# Altium PCB stm32f103.PcbDoc
Units mm, origin at the board's own origin, x right, y up, seen from the top; angles counter-clockwise.
Board outline 59.05 x 67.94 mm, 2 copper layers (Top Layer, Bottom Layer); 29 components, 48 nets, 158 pads, 41 vias.
Unrouted connection lines stored in the file: 1.
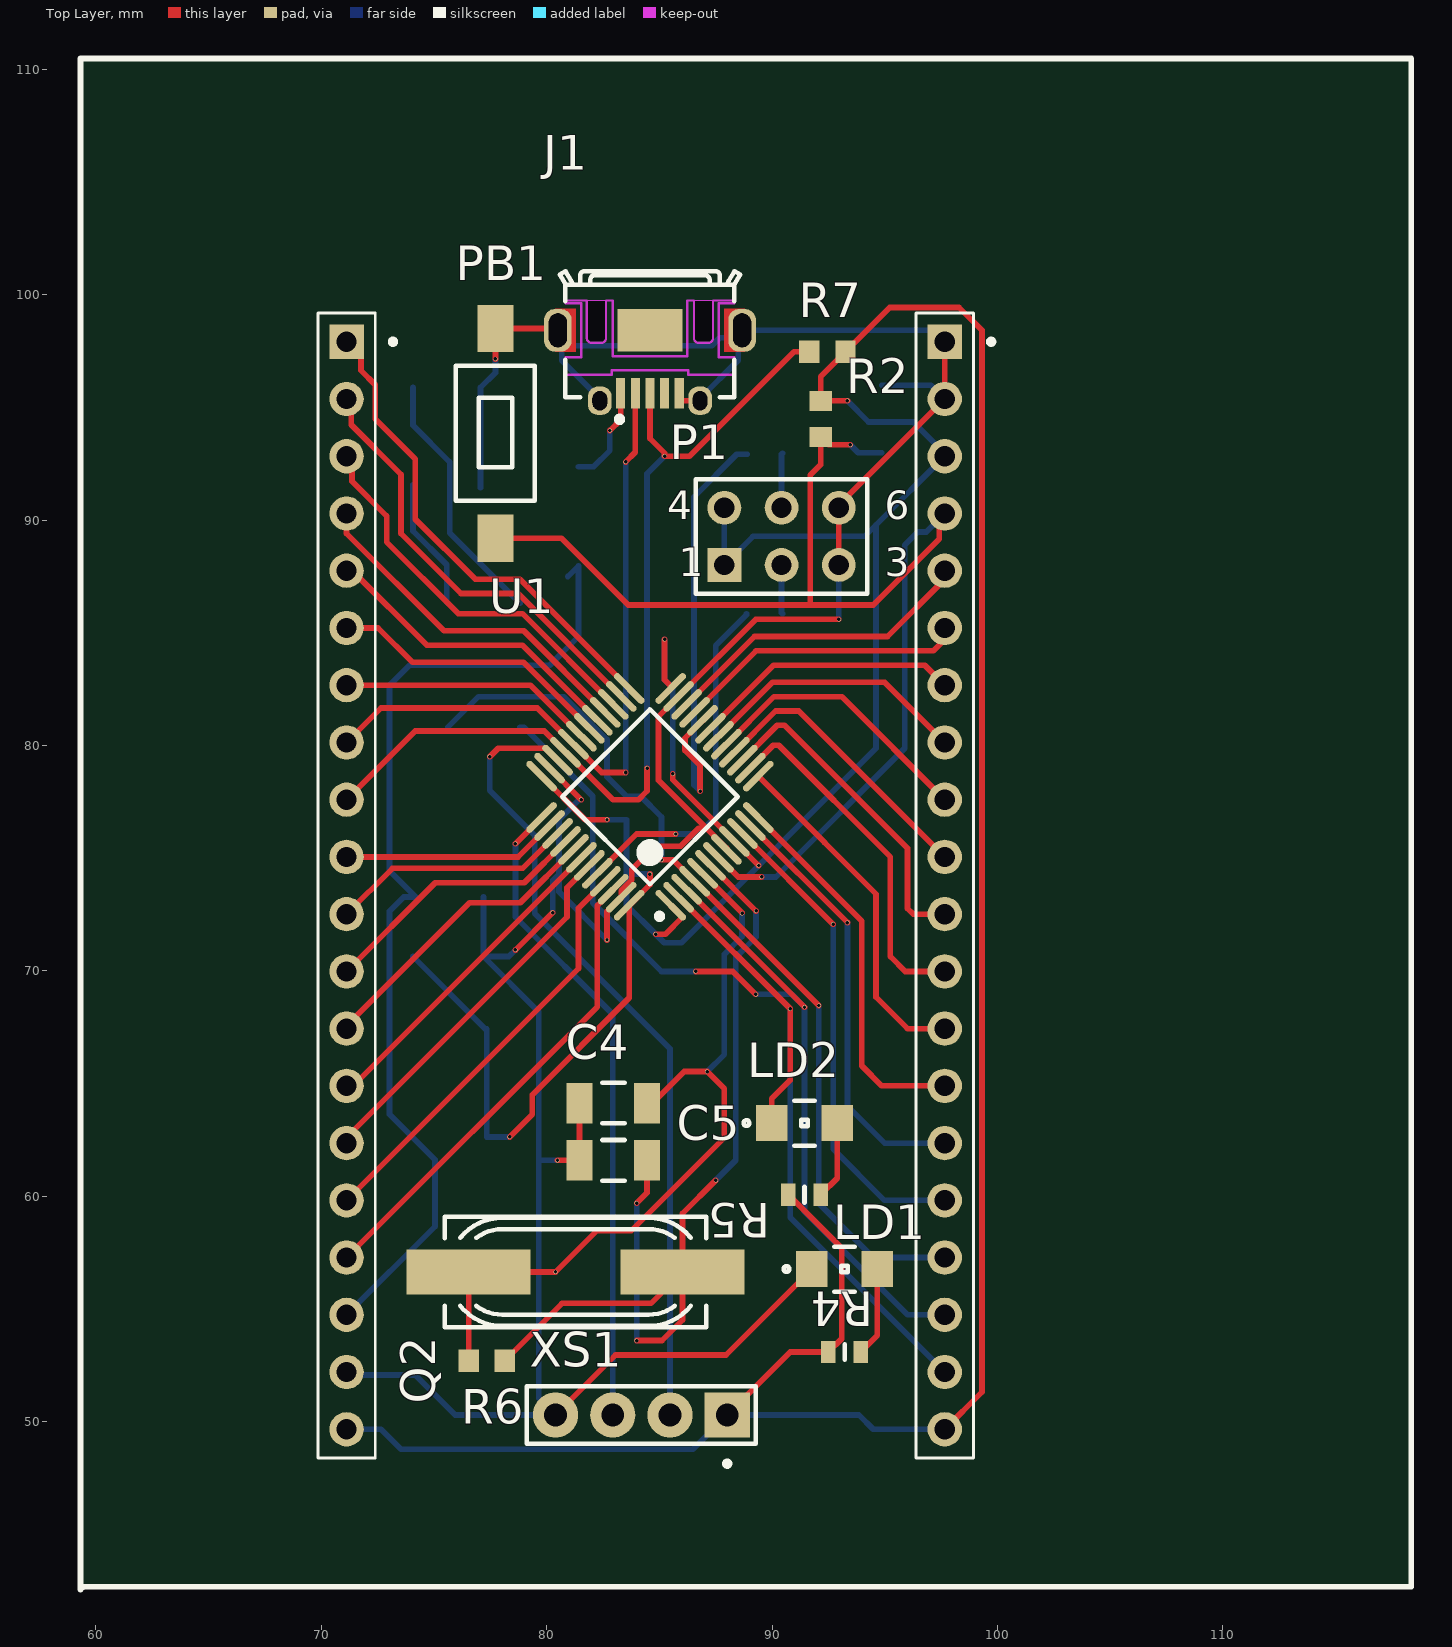
[diagram p0: Top Layer view]
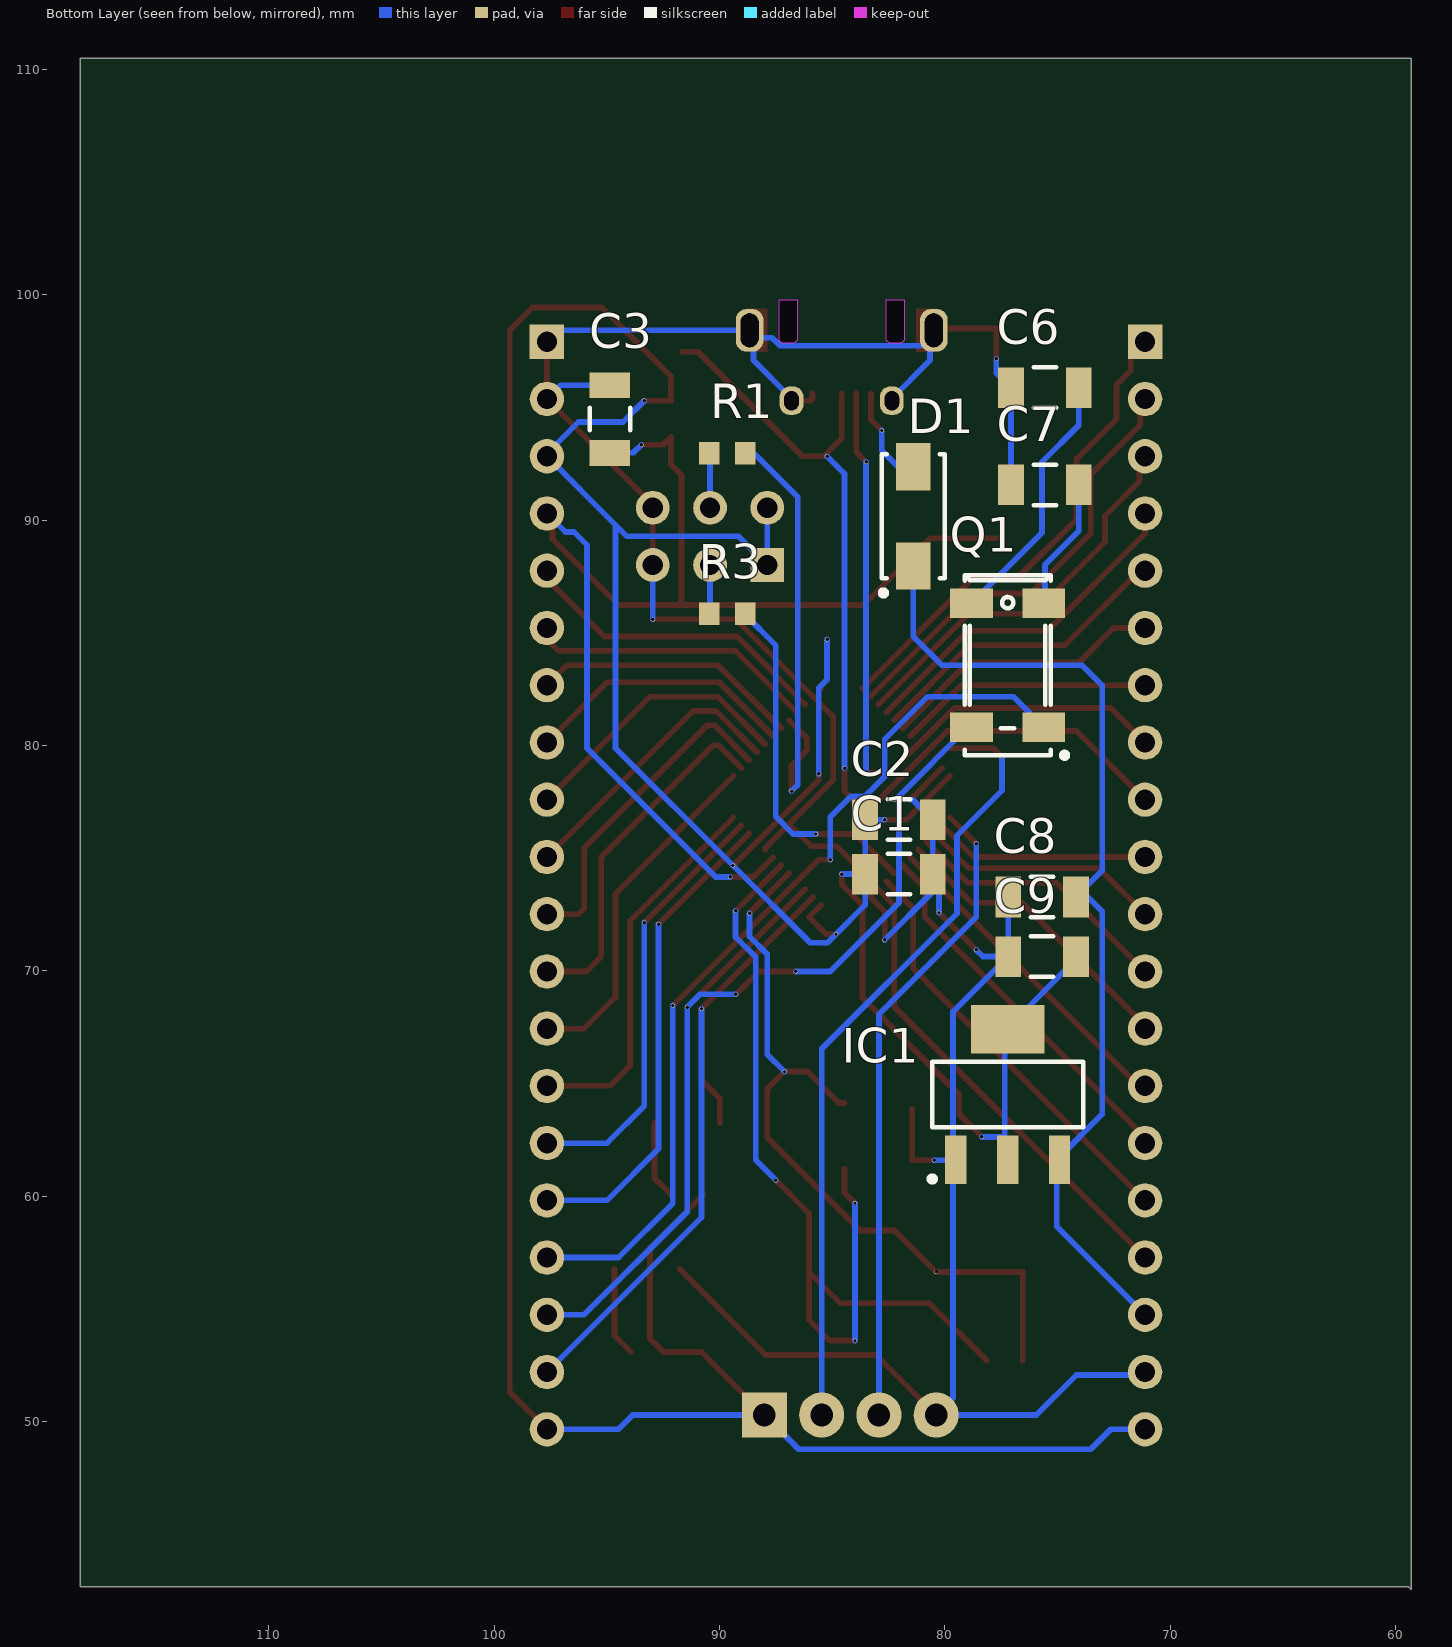
[diagram p1: Bottom Layer view, seen from below]
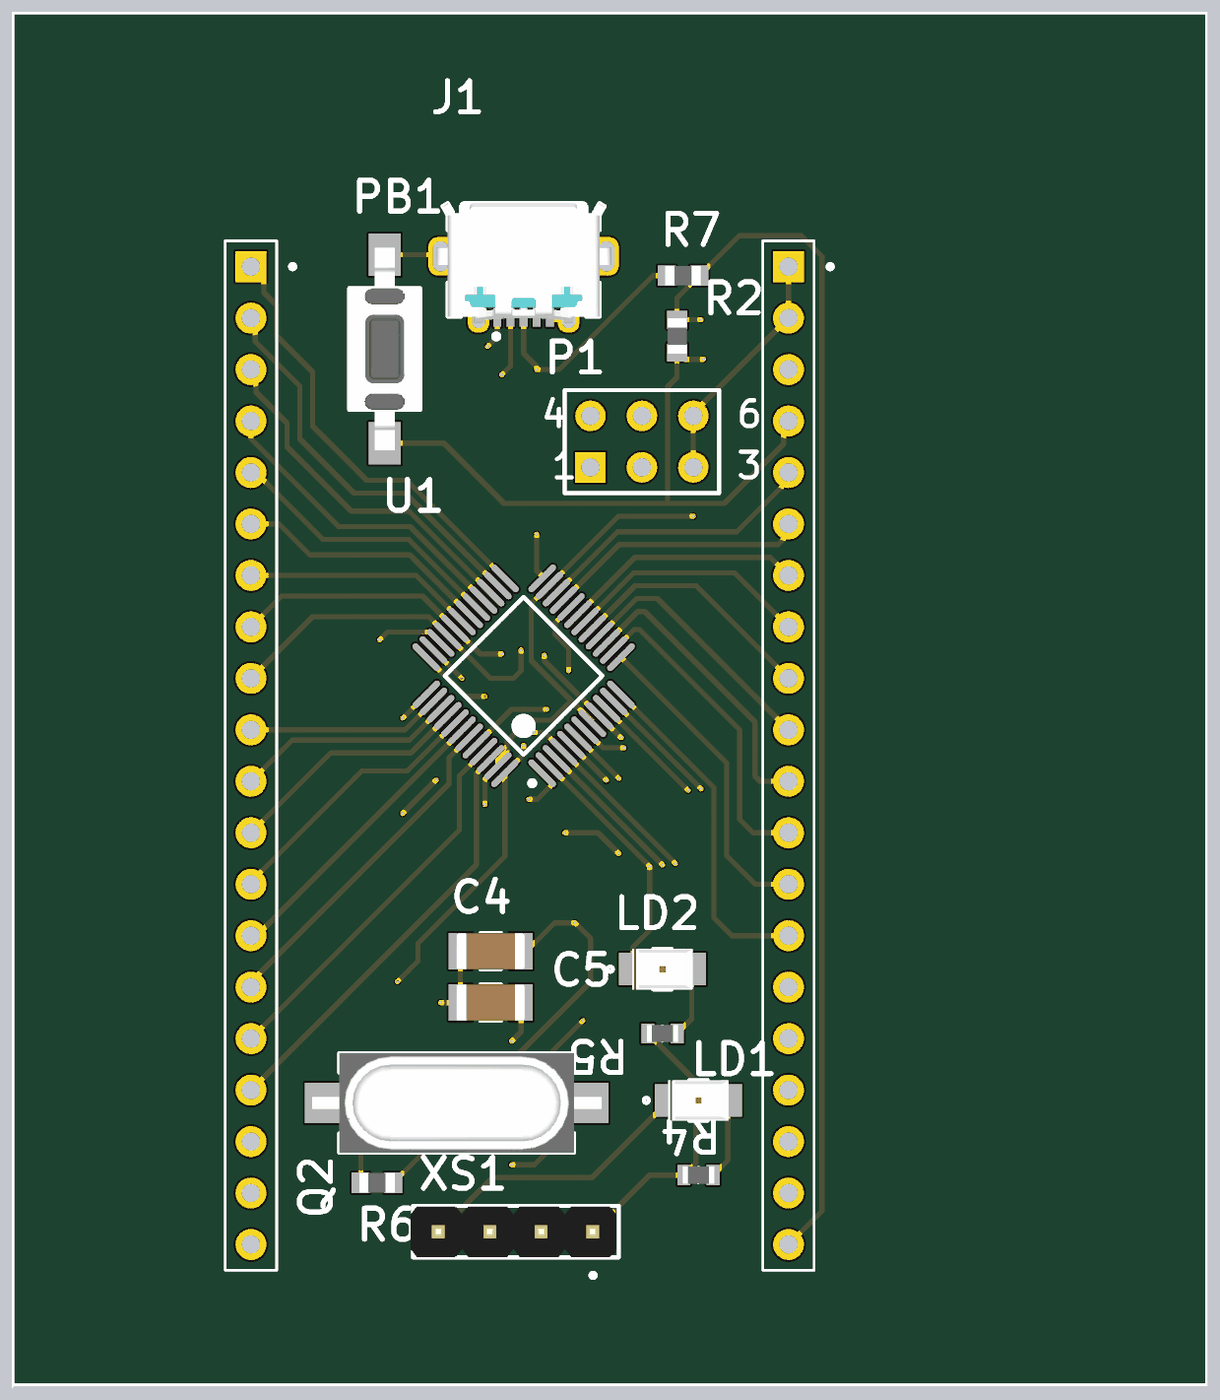
[diagram p2: 3D render of the assembled board from above, using the file's embedded part models]
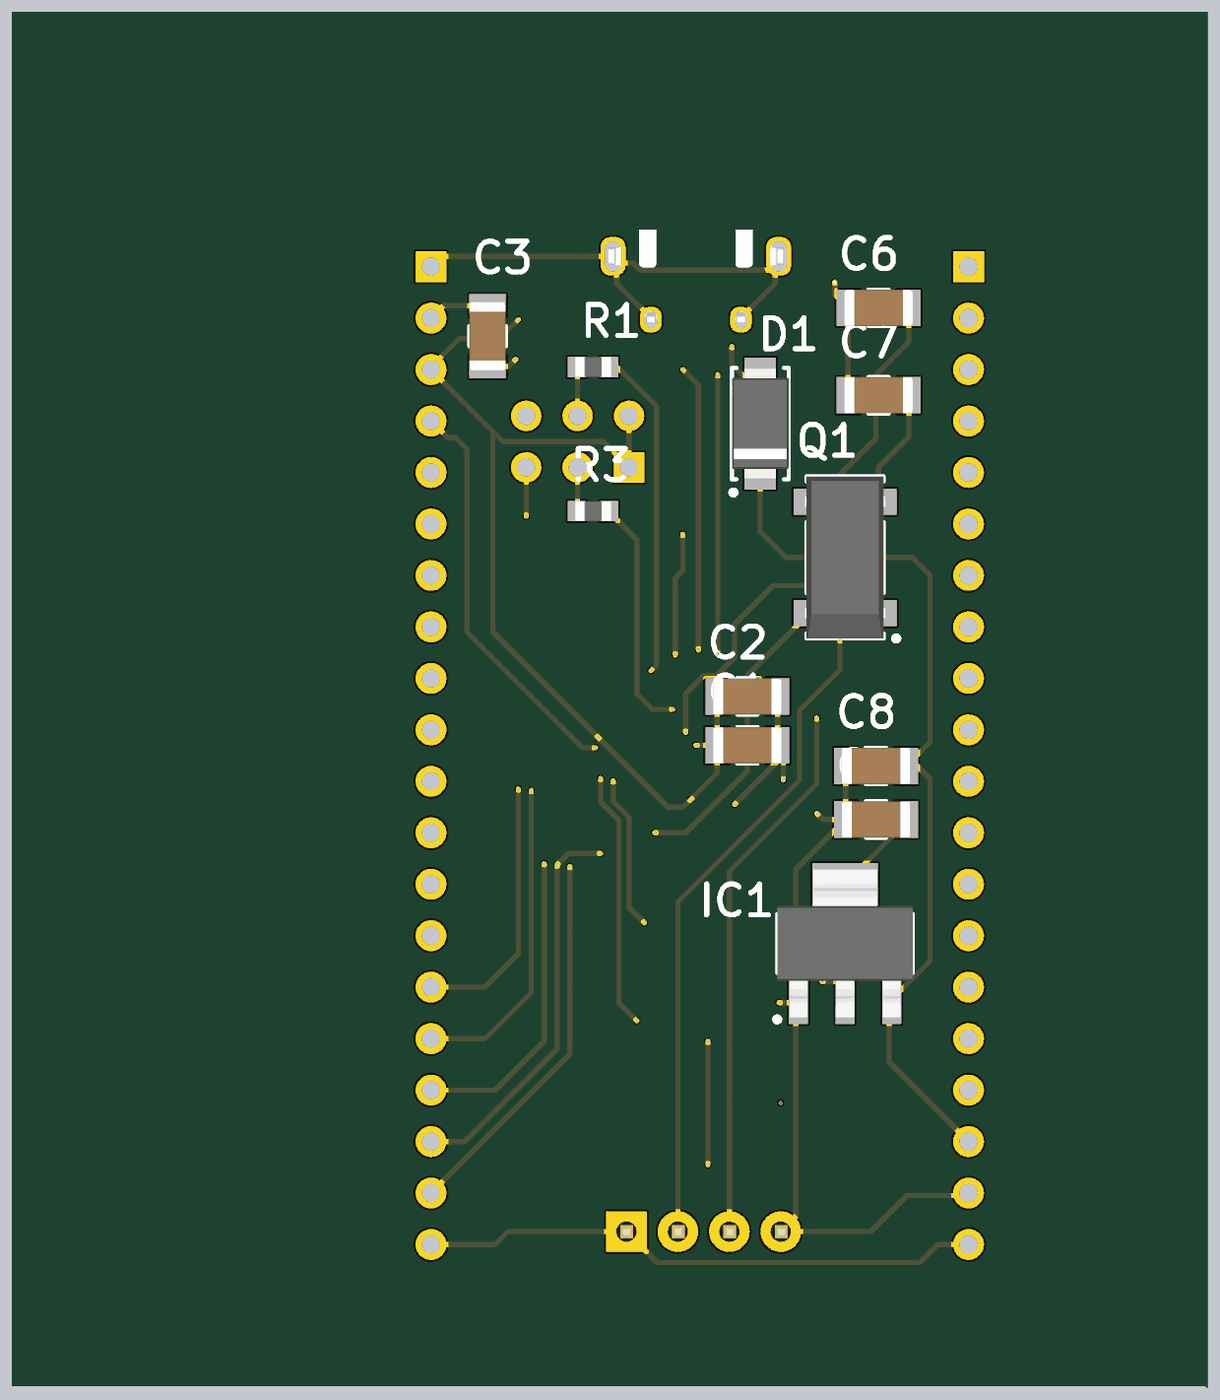
[diagram p3: 3D render of the assembled board from below, using the file's embedded part models]

## Layer stack, top to bottom
Top Solder: solder mask 0.0102, Solder Resist, Dk 3.5
Top Layer: signal copper 0.0356
Dielectric 1: dielectric 0.32, FR-4, Dk 4.8
Bottom Layer: signal copper 0.0356
Bottom Solder: solder mask 0.0102, Solder Resist, Dk 3.5

## Board outline
59.309,42.545 59.436,42.672 118.364,42.672 118.364,110.49 59.309,110.49

## Design rules (kind name [scope] priority, off if disabled: settings)
Clearance [All] p1: gap=0.01
HoleToHoleClearance [All] p1: gap=0 allowstackedmicrovias=TRUE
MinimumSolderMaskSliver [All] p1: minsoldermaskwidth=0
PolygonConnect [All] p1: connectstyle=Relief reliefconductorwidth=0.254 reliefentries=4 polygonreliefangle="90 Angle" airgapwidth=0.254
RoutingVias [All] p1: holewidth=0.711 width=1.27 viastyle="Through Hole" minholewidth=0.711 minwidth=1.27 maxholewidth=0.711 maxwidth=1.27
SilkToSilkClearance [All] p1: silktosilkclearance=0
SilkToSolderMaskClearance [IsPad] p1: minsilkscreentomaskgap=0 clearancetoexposedcopper=TRUE
SolderMaskExpansion [All] p1: expansion=0.102
UnRoutedNet [All] p1 off:
Width [All] p1: maxlimit=0.254 minlimit=0.254 preferedwidth=0.254
25 further rules are at their usual default settings.

## Components (designator, comment, footprint, x,y, rotation, side; value= is the part's Value field where it differs from the comment)
C1 "100nF" CAPC3216X140N 82.042,74.295 r180 bottom
C2 "1uF" CAPC3216X140N 82.042,76.708 r180 bottom
C3 "100nF" CAPC3216X140N 94.869,94.488 r270 bottom
C4 "22pF" CAPC3216X140N 82.956,64.135 r0 top
C5 "22pF" CAPC3216X140N 82.956,61.595 r0 top
C6 "22pF" CAPC3216X140N 75.565,95.885 r0 bottom
C7 "22pF" CAPC3216X140N 75.565,91.567 r0 bottom
C8 "100nF" CAPC3216X140N 75.692,73.279 r180 bottom
C9 "100nF" CAPC3216X140N 75.692,70.634 r180 bottom
D1 "BZG03C13" DIOM5326X230N 81.407,90.17 r90 bottom
IC1 "1117" SOT230P700X180-4N 77.216,64.516 r90 bottom
J1 "Micro-USB AB 2.0" HIROSE_ZX62RD-AB-5P8(30) 84.582,95.625 r180 top
LD1 "Red" LED_DIALIGHT_597-3111-507F 93.218,56.769 r0 top
LD2 "Red" LED_DIALIGHT_597-3111-507F 91.44,63.246 r0 top
P1 "Header 3X2A" HDR2X3_CEN 87.884,88.011 r0 top
PB1 "Push Button" PB_TYCO_FSMSM 77.724,93.853 r90 top
Q1 "32.768kHz" XTAL_ABRACON_ABS25 77.216,83.566 r0 bottom
Q2 "8Mhz" XTAL1160X490X430 81.28,56.642 r180 top
R1 "10k" RESC1608X55N 89.662,92.964 r0 bottom
R2 "10k" RESC1608X55N 92.16,94.488 r90 top
R3 "10k" RESC1608X55N 89.662,85.852 r0 bottom
R4 "500R" RESC1509X55N 93.218,53.086 r180 top
R5 "500R" RESC1509X55N 91.44,60.071 r180 top
R6 "1M" RESC1608X55N 77.343,52.705 r180 top
R7 "1k5" RESC1608X55N 92.456,97.475 r180 top
U1 "STM32F103C8T6" STM-LQFP48_N 84.582,77.724 r135 top
XS1 "Ğàçú¸ì PLS-4" "HDR1X4 - WA" 88.011,50.292 r180 top
XS2 "Ğàçú¸ì PLS-20" 20SIN 71.12,97.917 r0 top
XS3 "Ğàçú¸ì PLS-20" 20SIN 97.663,97.917 r0 top

## Footprints (in the part's own frame and the unit in brackets; to place one, negate y for a bottom-side part, rotate by r counter-clockwise, add the part's x,y. Pads: shape width x height; smd on the part's side, far side on the other; paste and mask are expansions set on the pad)
20SIN [mil]
  rect 60x60 hole 35.43: 1(0,0)
  round 60 hole 35.43: 2(0,-100) 3(0,-200) 4(0,-300) 5(0,-400) 6(0,-500) 7(0,-600) 8(0,-700) 9(0,-800) 10(0,-900) 11(0,-1000) 12(0,-1100) 13(0,-1200) 14(0,-1300) 15(0,-1400) 16(0,-1500) 17(0,-1600) 18(0,-1700) 19(0,-1800) 20(0,-1900)
  silkscreen extent -50,-1950 85,50
CAPC3216X140N [mm] "Chip Capacitor, Body 3.2x1.6mm, IPC Medium Density"
  rect 1.15x1.8 smd: 1(-1.5,0) 2(1.5,0)
  silkscreen extent -0.5,-0.9 0.5,0.9, body extent -1.7,-0.9 1.7,0.9, height 1.4
DIOM5326X230N [mm] "DO-214-AC/SMA Molded Diode, Body 5.3x2.6mm, IPC Medium Density"
  rect 2.1x1.55 smd: 1(-2.2,0) 2(2.2,0)
  silkscreen extent -3.52,-1.4 2.75,1.45, body extent -2.75,-1.4 2.75,1.4, height 2.3
"HDR1X4 - WA" [mm] "Ğàçúåì äâóõğÿäíûé, øàã 2,54 ìì."
  rect 2x2 hole 1: 1(0,0)
  round 2 hole 1: 2(2.54,0) 3(5.08,0) 4(7.62,0)
  silkscreen extent -1.27,-1.27 8.89,2.26, body extent -1.15,-1.24 9.01,1.26, height 8.61
HDR2X3_CEN [mm] "Connector; Header; 3x2 Position"
  rect 1.5x1.5 hole 0.9: 1(0,0)
  round 1.5 hole 0.9: 2(2.54,0) 3(5.08,0) 4(0,2.54) 5(2.54,2.54) 6(5.08,2.54)
  silkscreen extent -1.27,-1.27 6.35,3.81
HIROSE_ZX62RD-AB-5P8(30) [mm] "Right Angle, SMD Micro-USB Type AB - Reverse (Top mount), Shell Through Hole"
  rect 0.4x1.35 smd: 1(1.3,0) 2(0.65,0) 3(0,0) 4(-0.65,0) 5(-1.3,0)
  rrect80% 1.225x1.9 hole 0.8 slot 1.5 at 90 deg: 6(-4.088,-2.8) 6(4.088,-2.8)
  rrect80% 1.05x1.25 hole 0.65 slot 0.85 at 90 deg: 6(-2.225,0.325) 6(2.225,0.325)
  rect 2.9x1.9 smd: PastePad(0,-2.8)
  Top Layer region: -4.2,-1.85 -4.2,-3.75 -3.3,-3.75 -3.3,-3.75 -3.3,-1.85
  Top Layer region: 4.2,-3.75 4.2,-1.85 3.3,-1.85 3.3,-1.85 3.3,-3.75
  Top Layer keep-out lines w0.1: 3.75,-0.825 1.7,-0.825 1.7,-1.025 -1.7,-1.025 -1.7,-0.825 -3.75,-0.825 -3.75,-1.6 -3.05,-1.6 -3.05,-4 -3.75,-4 -3.75,-4.125 -2.8,-4.125 -2.8,-2.45 cw(c-2.6,-2.45) -2.6,-2.25 -2.15,-2.25 cw(c-2.15,-2.45) -1.95,-2.45 -1.95,-4.125 -1.65,-4.125 -1.65,-1.65 1.65,-1.65 1.65,-4.125 1.95,-4.125 1.95,-2.45 cw(c2.15,-2.45) 2.15,-2.25 2.6,-2.25 cw(c2.6,-2.45) 2.8,-2.45 2.8,-4.125 3.75,-4.125 3.75,-4 3.05,-4 3.05,-1.6 3.75,-1.6 3.75,-0.825
  Keep-Out Layer board cut-out: 1.95,-4.125 1.95,-2.45 1.965,-2.373 2.009,-2.309 2.074,-2.265 2.15,-2.25 2.15,-2.25 2.6,-2.25 2.677,-2.265 2.741,-2.309 2.785,-2.373 2.8,-2.45 2.8,-2.45 2.8,-4.125
  Keep-Out Layer board cut-out: -2.8,-4.125 -2.8,-2.45 -2.785,-2.373 -2.741,-2.309 -2.676,-2.265 -2.6,-2.25 -2.6,-2.25 -2.15,-2.25 -2.073,-2.265 -2.009,-2.309 -1.965,-2.373 -1.95,-2.45 -1.95,-2.45 -1.95,-4.125
  silkscreen extent -4,-5.42 4,1.27, body extent -4.32,-5.42 4.33,0.47, height 2.78
LED_DIALIGHT_597-3111-507F [mm] "SMT AlGaAs Red LED, Body 3x1.6mm (1208),  DIALIGHT 597 Serie"
  rect 1.4x1.6 smd: 1(-1.45,0) 2(1.45,0)
  silkscreen extent -2.7,-1 0.45,1, body extent -1.5,-1 1.5,1, height 1.5
PB_TYCO_FSMSM [mm] "Body 3.5x6.0mm, Pushbutton Switch,  TYCO FSMSM Serie"
  rect 2.1x1.6 smd: 1(-4.65,0) 2(4.65,0)
  silkscreen extent -3,-1.75 3,1.75, body extent -5,-1.75 5,1.75, height 4.3
RESC1509X55N [mm] "Chip Resistor, EIA 0603, Metric 1608, 1.55mm L X 0.85mm W X 0.55mm H, IPC Medium Density"
  rect 0.65x0.99 smd: 1(-0.72,0) 2(0.72,0)
  silkscreen extent 0,-0.35 0,0.35, body extent -0.77,-0.42 0.78,0.43, height 0.55
RESC1608X55N [mm] "Chip Resistor, EIA 0603, Metric 1608, Body 1.6x0.8mm, IPC Medium Density"
  rect 0.9x1 smd: 1(-0.8,0) 2(0.8,0)
  body extent -0.87,-0.47 0.88,0.48, height 0.55
SOT230P700X180-4N [mm] "SOT223, 2.30mm pitch; 3 pin, 3.70mm W X 6.70mm L, IPC Medium Density"
  rect 2.15x0.95 smd: 1(-2.9,2.3) 2(-2.9,0) 3(-2.9,-2.3)
  rect 2.15x3.25 smd: 4(2.9,0)
  silkscreen extent -3.87,-3.35 1.45,3.48, body extent -3.65,-3.35 3.65,3.35, height 1.81
STM-LQFP48_N [mm] "QFP, 48-Leads, Body 7x7mm, Pitch 0.5mm, IPC Medium Density"
  oval 1.8x0.3 smd: 1(-4.05,2.75) 2(-4.05,2.25) 3(-4.05,1.75) 4(-4.05,1.25) 5(-4.05,0.75) 6(-4.05,0.25) 7(-4.05,-0.25) 8(-4.05,-0.75) 9(-4.05,-1.25) 10(-4.05,-1.75) 11(-4.05,-2.25) 12(-4.05,-2.75) 25(4.05,-2.75) 26(4.05,-2.25) 27(4.05,-1.75) 28(4.05,-1.25) 29(4.05,-0.75) 30(4.05,-0.25) 31(4.05,0.25) 32(4.05,0.75) 33(4.05,1.25) 34(4.05,1.75) 35(4.05,2.25) 36(4.05,2.75)
  oval 0.3x1.8 smd: 13(-2.75,-4.05) 14(-2.25,-4.05) 15(-1.75,-4.05) 16(-1.25,-4.05) 17(-0.75,-4.05) 18(-0.25,-4.05) 19(0.25,-4.05) 20(0.75,-4.05) 21(1.25,-4.05) 22(1.75,-4.05) 23(2.25,-4.05) 24(2.75,-4.05) 37(2.75,4.05) 38(2.25,4.05) 39(1.75,4.05) 40(1.25,4.05) 41(0.75,4.05) 42(0.25,4.05) 43(-0.25,4.05) 44(-0.75,4.05) 45(-1.25,4.05) 46(-1.75,4.05) 47(-2.25,4.05) 48(-2.75,4.05)
  silkscreen extent -4.17,-2.75 2.75,3.57, body extent -3.5,-3.5 3.5,3.5, height 1.6
XTAL1160X490X430 [mm] "HC49/4H SMX Case, SMD Cristal, Body 11.6x4.9mm"
  rect 5.5x2 smd: 1(-4.75,0) 2(4.75,0)
  silkscreen extent -5.8,-2.45 5.8,2.45, body extent -7.15,-2.45 7.15,2.45, height 4.3
XTAL_ABRACON_ABS25 [mm] "4 Pins, 8mm L X 3.8mm W X 2.7mm H, SMD Crystal, ABS25 Serie"
  rect 1.9x1.3 smd: 1(-1.6,2.75) 2(-1.6,-2.75) 3(1.6,-2.75) 4(1.6,2.75)
  silkscreen extent -2.65,-4 1.9,4.12, body extent -2,-4 2,4, height 2.7

## Part data
C1 C3 C8 C9: library part CC1206_100NF_50V_10%_X7R, "Non-polarised capacitor"
C2: library part CC1206_1UF_50V_10%_X7R, "Non-polarised capacitor"
C4 C5: library part CC1206_12PF_50V_5%_NP0, "Non-polarised capacitor"
C6 C7: library part CC1206_100PF_50V_5%_NP0, "Non-polarised capacitor"
D1: "Zener Diode"
IC1: library part ADP3339AKCZ-1.8, "3-Terminal Regulator 1=GND 2=OUT 3=IN 4=OUT"
J1: library part HIROSE_ZX62RD-AB-5P8(30), "5 Pin + 1 Shield USB Receptacle"
LD1 LD2: library part LED_DIALIGHT_597-3111-507F, "LED Red 1C 2A"
P1: "Header, 3-Pin, Dual row"
PB1: library part PB_TYCO_FSMSM, "Push-Button Switch SPDT"
Q1: library part XTAL_32.768KHZ_ABRACON_ABS25-32.768KHZ-T, "Crystal 4 pins 1=XTAL Control 2 And 3=NC 4=XTAL"
Q2: library part XTAL_10MHZ_IQD_LFXTAL003166, "Quartz Crystal"
R1 R3: library part R0603_10K_0.1%_0.063W_10PPM, "Resistor - 0.1%"
R2: library part R0603_10K_1%_0.1W_100PPM, "Resistor - 1%"
R4 R5: library part R0603_500M_5%_0.1W_250PPM_OHMITE_HVC, "Resistor - 5%"
R6: library part R0603_1M_1%_0.1W_100PPM, "Resistor - 1%"
R7: library part R0603_1K5_0.1%_0.063W_10PPM, "Resistor - 0.1%"
U1: "ARM Cortex-M3 32-bit MCU, 64 KB Flash, 20 KB Internal RAM, 37 I/Os, 48-pin LQFP, -40 to 85 degC, Tray"
XS1: library part "HDR 1x4", "Male, 4 pin single in line, 2.54"
XS2 XS3: library part "HDR 1x20", "Male, 20 pin single in line, 2.54"

## Via types
v1: diameter 0.178, hole 0.152, Top Layer to Bottom Layer, 40 vias
v2: diameter 0.172, hole 0.158, Top Layer to Bottom Layer, 1 vias

## Nets (pads, with @x,y where several pads share a name; then routed paths per layer and width w, separated by ;. In a path a pad name is that pad's centre, name@x,y a point inside that pad or via, vN(x,y) a via of type N, cw(c..) or ccw(c..) an arc to the next point about the centre after c; other vN are vias at no path point)
5V: C8.2 D1.1 D1.2 IC1.3 J1.1 XS2.18 | length 49.2
  Top Layer w0.254: v1(82.804,93.98) 83.282,94.458 J1.1
  Bottom Layer w0.254: XS2.18 75.043,58.66 75.043,61.616 73.025,63.634 73.025,72.644 73.66,73.279 C8.2 73.025,74.446 73.025,82.677 73.914,83.566 80.137,83.566 81.407,84.836 D1.1 D1.1@80.94,87.503 ; D1.2 82.083,92.37 82.804,93.091 v1(82.804,93.98)
A0: U1.10 XS3.16 | length 21.6
  Top Layer w0.254: U1.10 v1(92.71,72.071)
  Bottom Layer w0.254: v1(92.71,72.071) 92.71,62.103 94.996,59.817 XS3.16
A1: U1.11 XS3.15 | length 19.2
  Top Layer w0.254: U1.11 v1(93.345,72.143)
  Bottom Layer w0.254: v1(93.345,72.143) 93.345,64.008 94.996,62.357 XS3.15
A2: U1.12 XS3.14 | length 17
  Top Layer w0.254: U1.12 93.98,72.215 93.98,65.786 94.869,64.897 XS3.14
A3: U1.13 XS3.13 | length 15.6
  Top Layer w0.254: U1.13 92.329,75.705 92.329,75.692 94.615,73.406 94.615,68.834 96.012,67.437 XS3.13
A4: U1.14 XS3.12 | length 15.8
  Top Layer w0.254: U1.14 90.05,80.01 90.297,80.01 95.25,75.057 95.25,70.634 95.907,69.977 XS3.12
A5: U1.15 XS3.11 | length 14.7
  Top Layer w0.254: U1.15 90.232,80.899 90.551,80.899 96.012,75.438 96.012,72.771 96.266,72.517 XS3.11
A6: U1.16 XS3.10 | length 12.8
  Top Layer w0.254: U1.16 90.16,81.534 91.186,81.534 XS3.10
A7: U1.17 XS3.9 | length 12.5
  Top Layer w0.254: U1.17 90.088,82.169 93.091,82.169 XS3.9
A8: U1.29 XS2.5 | length 13.9
  Top Layer w0.254: XS2.5 71.374,87.757 74.676,84.455 78.912,84.455 U1.29
A9: U1.30 XS2.6 | length 12.6
  Top Layer w0.254: XS2.6 72.517,85.217 74.041,83.693 78.967,83.693 U1.30
A10: U1.31 XS2.7 | length 11.4
  Top Layer w0.254: XS2.7 79.275,82.677 U1.31
A11: J1.2 U1.32 XS2.8 | length 31.2
  Top Layer w0.254: XS2.8 72.644,81.661 79.584,81.661 U1.32 82.442,78.803 v2(83.502,78.803) ; v1(83.502,92.583) 83.932,93.012 J1.2
  Bottom Layer w0.254: v2(83.502,78.803) v1(83.502,92.583)
A12: J1.3 R7.2 U1.33 XS2.9 | length 42.6
  Top Layer w0.254: XS2.9 74.168,80.645 79.893,80.645 U1.33 82.941,77.597 84.074,77.597 84.455,77.978 ; 84.456,77.977 v1(84.456,78.997) ; J1.3 84.582,93.624 85.232,92.974 v1(85.232,92.837) 86.333,92.837 90.971,97.475 R7.2
  Bottom Layer w0.254: v1(84.456,78.997) 84.456,92.061 v1(85.232,92.837)
A15: U1.38 XS2.10 | length 9.6
  Top Layer w0.254: XS2.10 78.733,75.057 U1.38
B0: U1.18 XS3.8 | length 12.1
  Top Layer w0.254: U1.18 90.016,82.804 94.996,82.804 XS3.8
B1: U1.19 XS3.7 | length 11.9
  Top Layer w0.254: U1.19 90.07,83.566 96.774,83.566 XS3.7
B3: U1.39 XS2.11 | length 10.8
  Top Layer w0.254: XS2.11 73.152,74.549 78.932,74.549 U1.39
B4: U1.40 XS2.12 | length 12.1
  Top Layer w0.254: XS2.12 75.057,73.914 79.004,73.914 U1.40
B5: U1.41 XS2.13 | length 13.4
  Top Layer w0.254: XS2.13 71.12,67.564 76.581,73.025 78.822,73.025 U1.41
B6: U1.42 XS2.14 | length 14.6
  Top Layer w0.254: XS2.14 71.401,64.897 U1.42
B7: U1.43 XS2.15 | length 16.8
  Top Layer w0.254: XS2.15 71.12,62.611 80.899,72.39 80.899,73.687 U1.43
B8: U1.45 XS2.16 | length 18.9
  Top Layer w0.254: XS2.16 81.407,70.104 81.407,72.781 U1.45
B9: U1.46 XS2.17 | length 21.2
  Top Layer w0.254: XS2.17 82.249,68.406 82.249,72.903 82.956,73.61 U1.46
B10: U1.21 XS3.6 | length 13
  Top Layer w0.254: U1.21 89.291,84.201 97.155,84.201 97.663,84.709 XS3.6
B11: U1.22 XS3.5 | length 14.1
  Top Layer w0.254: U1.22 89.219,84.836 95.123,84.836 97.663,87.376 XS3.5
B12: U1.25 XS2.1 | length 21.7
  Top Layer w0.254: XS2.1 71.755,97.282 71.755,96.647 72.39,96.012 72.39,94.488 74.168,92.71 74.168,90.043 76.835,87.376 78.819,87.376 U1.25
B13: U1.26 XS2.2 | length 19.7
  Top Layer w0.254: XS2.2 71.329,95.168 71.329,94.234 73.533,92.03 73.533,89.408 76.2,86.741 78.74,86.741 83.302,82.179 U1.26
B14: U1.27 XS2.3 | length 17.6
  Top Layer w0.254: XS2.3 71.363,92.594 71.363,91.724 72.898,90.189 72.898,89.027 76.073,85.852 78.929,85.852 U1.27
B15: U1.28 XS2.4 | length 15.7
  Top Layer w0.254: XS2.4 71.12,89.408 75.438,85.09 78.984,85.09 U1.28
BOOT0: P1.2 R3.2 | length 2.2
  Bottom Layer w0.254: P1.2 90.424,85.89 R3.2
BOOT1: P1.5 R1.2 | length 2.4
  Bottom Layer w0.254: P1.5 90.424,92.926 R1.2
C13: LD2.1 U1.2 XS3.19 | length 31.4
  Top Layer w0.254: U1.2 v1(90.805,68.319) 90.805,65.151 89.99,64.336 LD2.1
  Bottom Layer w0.254: v1(90.805,68.319) 90.805,59.055 XS3.19
C14: Q1.4 U1.3 XS3.18 | length 45.1
  Top Layer w0.254: U1.3 v1(91.44,68.391) ; v1(86.614,69.977) 88.255,69.977 89.271,68.961 v1(89.281,68.961)
  Bottom Layer w0.254: Q1.4 78.979,80.816 82.042,77.753 82.042,73.025 85.09,69.977 v1(86.614,69.977) ; v1(89.281,68.961) 90.87,68.961 v1(91.44,68.391) 91.44,59.309 96.012,54.737 XS3.18
C15: Q1.1 U1.4 XS3.17 | length 40.1
  Top Layer w0.254: v1(85.09,74.93) 85.608,74.93 U1.4 v1(92.075,68.463)
  Bottom Layer w0.254: Q1.1 76.969,82.169 80.772,82.169 82.677,80.264 82.677,78.613 83.545,77.745 84.174,77.745 85.09,76.829 v1(85.09,74.93) ; v1(92.075,68.463) 92.075,59.69 94.488,57.277 XS3.17
GND: C1.2 C2.2 C3.1 C4.1 C5.1 C6.2 C7.2 C8.1 C9.1 IC1.1 J1.5 J1.6 LD1.1 P1.3 P1.6 PB1.2 U1.8 U1.23 U1.35 U1.47 XS1.4 XS2.19 XS3.1 XS3.2 | length 146.6
  Top Layer w0.254: v1(77.724,97.155) PB1.2 80.416,98.503 J1.6@80.494,98.425 ; v1(78.613,70.929) v1(80.264,72.58) ; U1.35 81.527,77.597 v1(81.532,77.597) ; XS1.4 83.058,52.959 87.958,52.959 LD1.1 ; v1(80.481,61.595) C5.1 C4.1@81.456,63.881 ; v1(82.677,71.374) 82.677,72.637 U1.47 83.309,73.57 83.773,74.034 83.773,74.502 84.807,75.536 85.947,75.536 86.738,76.327 87.098,76.327 ; J1.5 85.882,95.373 85.955,95.3 J1.6@86.807,95.3 ; U1.8 87.976,75.449 87.098,76.327 ; v1(92.964,85.598) 89.274,85.598 U1.23 84.963,81.287 84.963,78.462 87.098,76.327 ; P1.3 P1.6 92.964,90.678 XS3.2 XS3.1
  Bottom Layer w0.254: XS2.19 71.247,52.07 74.168,52.07 75.946,50.292 XS1.4 79.643,51.04 IC1.1@79.643,61.616 ; C7.2@77.065,91.44 C7.2 C6.2 77.724,96.544 v1(77.724,97.155) ; C8.1 C9.1 ; v1(78.613,70.929) 78.318,70.634 C9.1 ; v1(80.264,72.58) 80.264,74.017 C1.2 ; v1(80.481,61.595) 79.664,61.595 IC1.1@79.643,61.616 ; v1(81.532,77.597) 81.431,77.597 C2.2 C1.2 ; J1.6@82.357,95.3 82.357,95.4 80.663,97.094 J1.6@80.663,98.115 ; v1(82.677,71.374) 80.542,73.509 C1.2 ; J1.6@86.807,95.3 86.807,95.4 88.501,97.094 J1.6@88.501,98.257 ; v1(92.964,85.598) P1.3 ; C3.1 97.052,95.988 XS3.2 ; XS3.1 97.155,98.425 88.67,98.425 J1.6@88.501,98.257 ; C9.1 79.643,68.183 IC1.1@79.643,61.616 ; J1.6@80.663,98.115 81.04,97.738 87.322,97.738 87.676,98.092 88.337,98.092 J1.6@88.501,98.257 ; J1.6@80.663,98.115 80.494,98.284 80.494,98.425 80.663,98.257 J1.6@80.663,98.115
NetC4_2: C4.2 Q2.2 R6.2 U1.5 | length 34.4
  Top Layer w0.254: R6.2 76.543,56.629 Q2.2 v1(80.391,56.642) 82.233,58.483 83.757,58.483 87.884,62.611 87.884,64.77 v1(87.122,65.532) 86.107,65.532 84.71,64.135 C4.2 ; U1.5 v1@88.666,72.58
  Bottom Layer w0.254: v1(87.122,65.532) 87.884,66.294 87.884,70.739 88.67,71.525 v1(88.67,72.549)
NetC5_2: C5.2 Q2.1 R6.1 U1.6 | length 42.1
  Top Layer w0.254: R6.1 80.683,55.245 84.633,55.245 Q2.1 ; v1(83.992,53.594) 85.12,53.594 86.03,54.504 Q2.1 ; v1(83.992,59.69) 84.456,60.154 C5.2@84.456,61.214 ; U1.6 v1(89.291,72.661) ; v1(87.503,60.706) 86.03,59.233 Q2.1
  Bottom Layer w0.254: v1(83.992,53.594) v1(83.992,59.69) ; v1(87.503,60.706) 88.392,61.595 88.392,70.602 89.291,71.501 v1(89.291,72.661)
NetC6_1: C6.1 Q1.3 | length 11.5
  Bottom Layer w0.254: C6.1 74.065,94.21 75.692,92.583 75.692,89.44 Q1.3
NetC7_1: C7.1 Q1.2 | length 5.9
  Bottom Layer w0.254: C7.1 74.065,89.521 75.565,88.021 75.565,86.367 Q1.2
NetLD1_2: LD1.2 R4.1 | length 4
  Top Layer w0.254: R4.1 94.668,53.816 LD1.2
NetLD2_2: LD2.2 R5.1 | length 3.5
  Top Layer w0.254: R5.1 92.89,60.801 LD2.2
NetR1_1: R1.1 U1.20 | length 20.1
  Top Layer w0.254: v1(86.807,77.978) 86.807,79.108 86.137,79.778 86.137,80.327 86.915,81.106 U1.20
  Bottom Layer w0.254: v1(86.807,77.978) 86.532,78.253 86.532,91.024 88.434,92.926 R1.1@88.9,92.926
NetR3_1: R3.1 U1.44 | length 15.9
  Top Layer w0.254: U1.44 83.992,76.073 v1(85.725,76.073)
  Bottom Layer w0.254: v1(85.725,76.073) 86.741,76.073 87.503,76.835 87.503,84.443 88.862,85.802 R3.1
NetU1_34: U1.34 XS1.2 | length 35.9
  Top Layer w0.254: v1(77.47,79.502) 77.849,79.881 79.95,79.881 U1.34
  Bottom Layer w0.254: v1(77.47,79.502) 77.47,78.002 79.47,76.002 79.47,72.549 85.471,66.548 XS1.2
NetU1_37: U1.37 XS1.3 | length 28.8
  Top Layer w0.254: v1(78.613,75.644) U1.37
  Bottom Layer w0.254: v1(78.613,75.644) 78.613,72.39 82.931,68.072 XS1.3
RESET: C3.2 PB1.1 R2.1 U1.7 XS3.4 | length 56.4
  Top Layer w0.254: PB1.1 80.645,89.203 83.615,86.233 91.694,86.233 ; U1.7 87.635,75.037 88.504,74.168 v1(89.535,74.168) ; v1(93.472,93.345) 92.503,93.345 R2.1 92.16,92.465 91.694,91.999 91.694,86.233 ; XS3.4 97.42,90.054 97.42,89.165 94.488,86.233 91.694,86.233
  Bottom Layer w0.254: v1(89.535,74.168) 90.17,74.168 95.885,79.883 95.885,88.9 96.462,89.477 96.843,89.477 XS3.4 ; v1(93.472,93.345) 93.829,92.988 C3.2
VB: C1.1 C2.1 C9.2 IC1.2 IC1.4 P1.1 P1.4 R2.2 R4.2 R5.2 R7.1 U1.1 U1.9 U1.24 U1.36 U1.48 XS1.1 XS2.20 XS3.3 XS3.20 | length 197.6
  Top Layer w0.254: v1(78.359,62.632) 79.364,63.638 79.364,64.505 83.663,68.804 U1.48 84.582,73.835 v1(84.582,74.295) ; U1.36 81.709,76.708 v1(82.677,76.708) ; v1(84.836,71.628) 85.274,71.628 86.032,72.385 U1.1 ; v1(85.232,84.709) 85.232,82.916 85.501,82.647 U1.24 ; v1(85.598,78.74) 85.598,78.476 U1.9 89.398,74.676 v1(89.408,74.676) ; XS1.1 90.805,53.086 R4.2 93.091,53.679 93.091,57.7 R5.2 ; v1(93.345,95.3) 92.172,95.3 R2.2 92.16,96.379 R7.1 95.222,99.441 98.298,99.441 99.314,98.425 99.314,51.308 XS3.20
  Bottom Layer w0.254: XS2.20 72.644,49.657 73.533,48.768 86.487,48.768 XS1.1 93.853,50.292 94.488,49.657 XS3.20 ; C9.2@74.065,70.634 77.249,67.449 77.283,67.416 77.343,67.416 77.343,62.632 v1(78.359,62.632) ; v1(82.677,76.708) C2.1 C1.1 ; v1(84.582,74.295) C1.1 ; v1(85.232,84.709) 85.232,82.916 85.598,82.55 v1(85.598,78.74) ; P1.4 P1.1 89.154,89.281 94.107,89.281 94.615,89.789 ; v1(93.345,95.3) 94.284,94.361 96.266,94.361 97.663,92.964 XS3.3 94.615,89.789 ; C1.1 83.542,72.922 v1(84.836,71.628) 85.217,71.247 85.979,71.247 v1(89.408,74.676) 94.615,79.883 94.615,89.789
pads on no net: J1.4 J1.PastePad

## Silkscreen, mask and mechanical layers (free items; w line width, h text height)
Top Overlay:
  the board outline again, w0.254

## Text inside footprints (layer, text, board x,y; h text height)
J1: Drill Drawing "r0.2" at 82.282,96.925 h1 r180; Drill Drawing "1.87" at 84.941,99.936 h1 r270; Drill Drawing "0.85" at 86.084,102.541 h1 r180; Mechanical 8 "PCB end" at 88.882,100.7 h0.5 r180
P1: Top Overlay "6" at 94.996,90.043 h1.27; Top Overlay "3" at 94.996,87.503 h1.27; Top Overlay "1" at 85.852,87.503 h1.27; Top Overlay "4" at 85.344,90.043 h1.27